# Allegro board CP2104_TEST_V10.brd
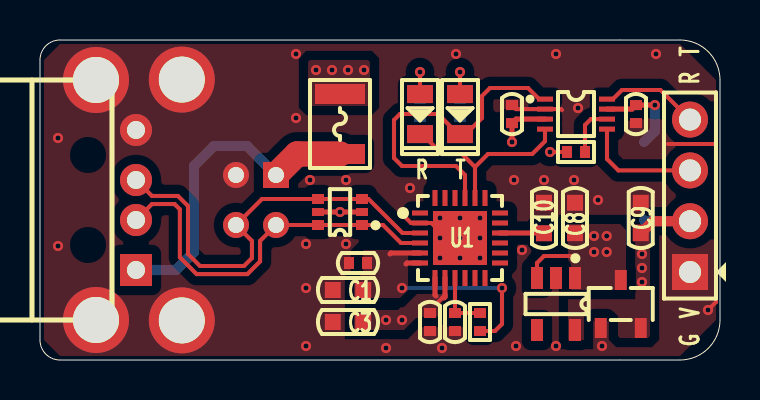
[diagram p0: board, top side]
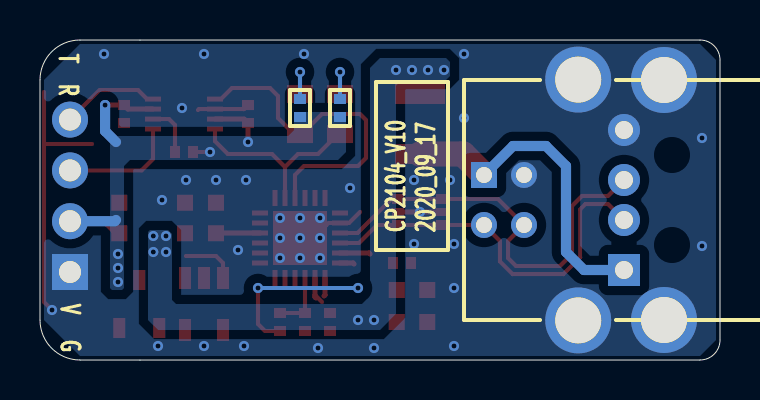
[diagram p1: board, bottom side, seen from below]

Outline 34 x 16 mm; copper layers: TOP, BOTTOM. Coordinates in mm from the lower left corner of the outline.
Outline path: 0,15 0,1 arc(0.29,0.29) 1,0 32,0 arc(33.41,0.59) 34,2 34,14 arc(33.41,15.41) 32,16 1,16 arc(0.29,15.71) 0,15

## Design rules (mm)
constraint set DEFAULT: min track width 0.203, pair gap 0.203
net group USB_D: nets USB_DM USB_DP

## Placement (name value [footprint] x y rotation side)
C1  10uF_10V  [C0603]  15.4 3.5 0 top
C2  100nF_50V  [C0402]  15.9 4.85 0 top
C3  10uF_10V  [C0603]  15.4 1.9 0 top
C4  100nF_50V  [C0402]  19.5 1.9 90 top
C5  100nF_50V  [C0402]  20.75 1.9 90 top
C8  10uF_10V  [C0603]  26.75 7.1 270 top
C9  10uF_10V  [C0603]  30.04 7.1 90 top
C10  10uF_10V  [C0603]  25.2 7.1 270 top
C11  100nF_50V  [C0402]  23.6 12.3 270 top
C12  100nF_50V  [C0402]  29.8 12.3 90 top
D1  LED_RED  [LED0805]  21 12.3 270 top
D2  LED_GREEN  [LED0805]  19 12.3 270 top
F1  SMD1210-200  [FUSE1210]  15 11.8 90 top
J1  -  [CN1X4-2P54-Z]  32.5 4.4 90 top
NOREF  -  []  0 0 0 top
NOREF#2  -  []  0 0 90 top
R1  4.7K  [R0402]  21 12.6 270 bottom
R2  4.7K  [R0402]  19 12.6 270 bottom
R3  10K  [R0402]  22 1.9 270 top
R4  10K  [R0402]  26.8 10.4 180 top
U1  CP2104-F03-GM  [QFN24-4X4X0R5-2R7X2R7]  21 6.1 270 top
U2  TPD4E1U06DCKR  [SOT363]  15 7.4 90 top
U4  XC6206P332MR  [SOT23-3]  29.04 2.8 0 top
U6  SPX3819M5-L-3-3/NI  [SOT23-5]  25.8 2.8 180 top
U7  TXS0102DCUR  [VSSOP8]  26.8 12.3 270 top
USB1  -  [USB-A-MALE]  5 8 180 top
USB2  -  [USB-B]  11.8 8 180 bottom

## Library data of the parts
C1-C5 C10-C12 = CAP NP_2
C8 C9 = CAP NP
D1 D2 = LED_4
F1 = FUSE
J1 = CONN RCPT 4
R1-R4 = R_Generic
U1 = CP2104-F03-GM
U2 = TPD4E1U06DBVR
U4 = XC6206P332MR
U6 = SPX3819M5-L-1-2
U7 = TXB0102DCUR
USB1 = USB-A-MALE
USB2 = USB-B

## Footprints (pads in the part's own frame, mm; a bottom-side part is the same pattern mirrored in y, then rotated)
C0402
  rect 0.5x0.6 smd: 1(-0.45,0) 2(0.45,0)
C0603
  rect 0.8x0.8 smd: 1(-0.762,0) 2(0.762,0)
CN1X4-2P54-Z
  rect 1.8x1.8 hole 1.1: 1(0,0)
  round 1.8 hole 1.1: 2(2.54,0) 3(5.08,0) 4(7.62,0)
FUSE1210
  rect 1x2.5 smd: 1(-1.5,0) 2(1.5,0)
LED0805
  rect 0.9x1.3 smd: 1(-1,0) 2(1,0)
QFN24-4X4X0R5-2R7X2R7
  rect 0.25x0.8 smd: 1(-1.25,-2) 2(-0.75,-2) 3(-0.25,-2) 4(0.25,-2) 5(0.75,-2) 6(1.25,-2) 13(1.25,2) 14(0.75,2) 15(0.25,2) 16(-0.25,2) 17(-0.75,2) 18(-1.25,2)
  rect 0.8x0.25 smd: 7(2,-1.25) 8(2,-0.75) 9(2,-0.25) 10(2,0.25) 11(2,0.75) 12(2,1.25) 19(-2,1.25) 20(-2,0.75) 21(-2,0.25) 22(-2,-0.25) 23(-2,-0.75) 24(-2,-1.25)
  rect 2.7x2.7 smd: 25(0,0)
R0402
  rect 0.5x0.6 smd: 1(-0.45,0) 2(0.45,0)
SOT23-3
  rect 0.6x1 smd: 1(-1,-1.2) 2(1,-1.2) 3(0,1.2)
SOT23-5
  rect 0.6x1.1 smd: 1(-0.95,-1.3) 2(0,-1.3) 3(0.95,-1.3) 4(0.95,1.3) 5(-0.95,1.3)
SOT363
  rect 0.5x0.6 smd: 1(-0.65,-1.1) 3(0.65,-1.1) 4(0.65,1.1) 6(-0.65,1.1)
  rect 0.4x0.6 smd: 2(0,-1.1) 5(0,1.1)
USB-A-MALE
  rect 1.6x1.6 hole 0.9: 1(0.2,3.5)
  round 1.6 hole 0.9: 2(0.2,1) 3(0.2,-1) 4(0.2,-3.5)
  round 3.3 hole 2.3: 5(2.2,6) 6(2.2,-6)
USB-B
  rect 1.3x1.3 hole 0.8: 1(0,1.25)
  round 1.3 hole 0.8: 2(0,-1.25) 3(2,-1.25) 4(2,1.25)
  round 3.3 hole 2.3: 5(4.71,6.02) 6(4.71,-6.02)
VSSOP8
  rect 0.25x0.8 smd: 1(-0.75,-1.55) 2(-0.25,-1.55) 3(0.25,-1.55) 4(0.75,-1.55) 5(0.75,1.55) 6(0.25,1.55) 7(-0.25,1.55) 8(-0.75,1.55)

## Nets
GND: C1.1 C2.1 C3.1 C4.1 C5.1 C8.1 C9.2 C10.1 C11.1 C12.1 J1.1 U1.2 U1.25 U2.2 U2.5(NC) U4.1(VSS) U6.2 U7.2 USB1.4 USB1.5 USB1.6 USB2.4 USB2.5 USB2.6
VCC_3.3V: C9.1 C11.2 C12.2 J1.2 R1.2 R2.2 R4.2 U4.2 U6.5(VOUT) U7.3 U7.7(VCCB)
VCC_3.3V_CP2104: C1.2 C2.2 R3.2 U1.5 U1.6
VCC_USB: C3.2 C4.2 C8.2 F1.2 U1.7 U1.8 U4.3 U6.1 U6.3
CP210X_RXD: D2.2(CATHODE) U1.20 U7.4
CP210X_TXD: D1.2(CATHODE) U1.21 U7.1
RXD: J1.3 U7.5
TXD: J1.4 U7.8
USB_DM: U1.4 U2.1 U2.6 USB1.2 USB2.2
USB_DP: U1.3 U2.3 U2.4 USB1.3 USB2.3
N17444119: D1.1 R1.1
N17444149: C5.2 R3.1 U1.9
N17444179: D2.1 R2.1
N17494883: F1.1 USB1.1(VBUS) USB2.1(VBUS)
N17506260: C10.2 U1.16(VPP)
N17507206: R4.1 U7.6

Pads without a net: U1 1 10 11 12 13 14 15 17 18 19 22 23 24; U6 4

## Via types
v1: diameter 0.508, hole 0.254, TOP to BOTTOM, 56 vias

## Routing (per net, layer and track width the routed paths; a pad name or vN(x,y) marks a point on that pad's centre or on a via; arc(x,y) is an arc through that point)
GND: length 21.8
  TOP w0.203: v1(33.4,2.5) 33.8,2.9 33.8,10.8 ; 33.8,10.8 33.8,13.4 ; 33.8,10.8 31.4,10.8 ; v1(21,6.1) 20.48,6.62 19.8,6.62 19.57,6.85 U1.2 18.55,6.85 18,7.4 ; C11.1 23.8,12.55 U7.2 26.05,12.55 26.1,12.5
  TOP w0.254: U2.2 v1(15,7.4) U2.5
  vias: v1(0.9,11.1) v1(0.9,5.7) v1(12.8,15.3) v1(12.8,12.1) v1(13.3,5.8) v1(13.3,3.6) v1(13.3,0.7) v1(13.5,9) v1(15.3,9) v1(15.3,5.8) v1(17.3,0.6) v1(18.5,8.6) v1(20,7.1) v1(20,6.1) v1(20,5.1) v1(20.1,0.6) v1(20.8,15.3) v1(21,7.1) v1(21,5.1) v1(22,7.1) v1(22,6.1) v1(22,5.1) v1(23.7,9) v1(23.8,0.7) v1(24.1,5.5) v1(25.2,9) v1(25.8,15.3) v1(25.8,0.7) v1(26.7,9) v1(26.9,12.6) v1(27.9,8) v1(28.1,0.7) v1(30.8,15.3)
VCC_3.3V: length 13.1
  TOP w0.203: R4.2 v1(25.5,10.4)
  TOP w0.254: U7.3 23.8,12.05 C11.2 v1(23.6,10.9) ; v1(30.75,12.75) C12.2 29.6,12.55 U7.7
  TOP w0.508: C9.1 30.64,6.94 J1.2
  BOTTOM w0.508: J1.2 30.26,6.94 30.2,7 ; v1(30.75,12.75) 30.75,11.45 30.2,10.9
  vias: v1(30.1,5.3) v1(30.1,4.6) v1(30.1,3.9)
VCC_3.3V_CP2104: length 10.3
  TOP w0.203: R3.2 22.75,1.45 23.1,1.8 v1(23.1,3.6)
  TOP w0.254: U1.5 17.55,5.35 17.5,5.3 ; 18.3,4.8 18.35,4.85 U1.6
  BOTTOM w0.203: v1(23.1,3.6) v1(18.1,3.6)
VCC_USB: length 5.2
  TOP w0.203: 20.25,3.25 19.9,2.9 ; U6.3 24.85,4.85 25.2,5.2 26.7,5.2
  TOP w0.254: 19.8,3.2 19.75,3.25 U1.7 ; U1.8 20.25,3.15 20.2,3.1
  vias: v1(13.8,14.5) v1(14.6,14.5) v1(15.4,14.5) v1(16.2,14.5) v1(17.3,2) v1(18.1,2) v1(27.7,6.2) v1(27.7,5.4) v1(28.34,6.2) v1(28.34,5.4)
CP210X_RXD: length 9.6
  TOP w0.203: 21.75,9.65 21.1,10.3 20.1,10.3 19.1,11.3 D2.2 ; 21.75,9.65 22.4,10.3 24.61,10.3 25.25,10.94 U7.4 ; 21.75,9.65 U1.20
CP210X_TXD: length 16.9
  TOP w0.203: U1.21 21.25,9.25 20.8,9.7 18.1,9.7 17.7,10.1 17.7,12 18,12.3 19.9,12.3 20.9,11.3 D1.2 21.3,11.3 22.1,12.1 22.1,13.2 22.5,13.6 24.4,13.6 24.95,13.05 U7.1
RXD: length 5.9
  TOP w0.203: U7.5 28.35,10.05 28.92,9.48 J1.3
TXD: length 5
  TOP w0.203: U7.8 28.65,13.05 29.1,13.5 31.02,13.5 J1.4
USB_DM: length 19.4
  TOP w0.203: USB1.2 5.6,7.8 6.73,7.8 6.99,7.53 6.99,5.13 7.83,4.29 10.37,4.29 11,4.93 11,5.95 USB2.2 U2.6 U2.1 17.15,6.75 18.05,5.85 U1.4
USB_DP: length 21.6
  TOP w0.203: U1.3 18.12,6.35 16.42,8.05 U2.3 U2.4 11.1,8.05 USB2.3 10.6,5.95 10.6,5.1 10.2,4.7 8,4.7 7.4,5.3 7.4,7.7 6.9,8.2 5.6,8.2 USB1.3
N17444119: length 2.5
  TOP w0.203: D1.1 v1(21,14.4)
  BOTTOM w0.203: v1(21,14.4) R1.1
N17444149: length 3
  TOP w0.203: R3.1 C5.2 U1.9
N17444179: length 2.5
  TOP w0.203: D2.1 v1(19,14.4)
  BOTTOM w0.203: v1(19,14.4) R2.1
N17494883: length 16.3
  TOP w1.27: USB2.1 12.85,10.3 F1.1
  BOTTOM w0.508: USB2.1 10.35,10.7 8.7,10.7 7.7,9.7 7.7,5.4 6.8,4.5 USB1.1
N17506260: length 2.2
  TOP w0.254: U1.16 25.19,6.35 C10.2
N17507206: length 2.6
  TOP w0.203: U7.6 27.55,12.05 27.25,11.75 R4.1

## Copper pours and planes (outline as drawn; the poured copper is in the pictures)
GND on TOP: 0.2,15 1,15.8 32,15.8 33.8,14 33.8,2 32,0.2 1,0.2 0.2,1 ; 1 cut-out
GND on BOTTOM: 0.2,15 1,15.8 32,15.8 33.8,14 33.8,2 32,0.2 1,0.2 0.2,1 ; 2 cut-outs
VCC_3.3V on TOP: 26.4,1 26.4,3 26.6,3.2 29.5,3.2 29.6,3.3 29.6,6.8 30.5,6.8 30.5,1.2 30.4,1.1 29,1.1 28.9,1.2 28.9,2.2 28.7,2.4 27.3,2.4 27.2,2.3 27.2,1
VCC_3.3V on BOTTOM: 18.7,12.4 21.3,12.4 21.3,11.5 21.6,11.2 30.2,11.2 30.5,10.9 30.5,3.6 30.4,3.5 29.9,3.5 29.8,3.6 29.8,9.7 29.5,10 19.1,10 18.7,10.4
VCC_3.3V_CP2104 on TOP: 18.4,5.5 16.2,5.5 16,5.3 16,4.3 15.7,4 15.7,3.1 18,3.1 18.4,3.5
VCC_USB on TOP: 26.4,6.8 29,6.8 29.3,6.5 29.3,3.5 26.4,3.5
VCC_USB on TOP: 16.4,12.7 13.5,12.7 13.4,12.8 13.4,14.9 13.5,15 16.4,15 16.5,14.9 16.5,12.8
VCC_USB on TOP: 15.7,1.5 18.2,1.5 18.8,2.1 19.8,2.1 20.4,2.7 20.4,3.3 18.7,3.3 17.9,2.5 15.7,2.5
VCC_USB on BOTTOM: 13.7,15.1 17,15.1 17.5,14.6 17.5,3.2 17.9,2.8 27.2,2.8 27.4,3 27.4,6.3 27.6,6.5 28.5,6.5 28.6,6.4 28.6,2 28.1,1.5 17,1.5 16.2,2.3 16.2,13.7 15.9,14 13.7,14 13.5,14.2 13.5,14.9

## Text on the board
Ref Des/Silkscreen Bottom: V | G | T | R | 2020_09_17 | CP2104_V10
Ref Des/Silkscreen Top: R | T | V | G
BODY_CENTER: FIGURE | FINISHED_SIZE | 0.254 | 0.8 | 0.9 | 1.1 | 2.3 | DRILL CHART: TOP to BOTTOM | ALL UNITS ARE IN MILLIMETERS | PLATED | QTY | 56 | 4 | 3 | 1 | 72 | TOTAL HOLES:
